# Altium PCB PCB_ACDC.PcbDoc
Units mm, origin at the board's own origin, x right, y up, seen from the top; angles counter-clockwise.
Board outline 302.1 x 78 mm, 2 copper layers (Top Layer, Bottom Layer); 162 components, 108 nets, 539 pads, 1 vias.
Unrouted connection lines stored in the file: 411.
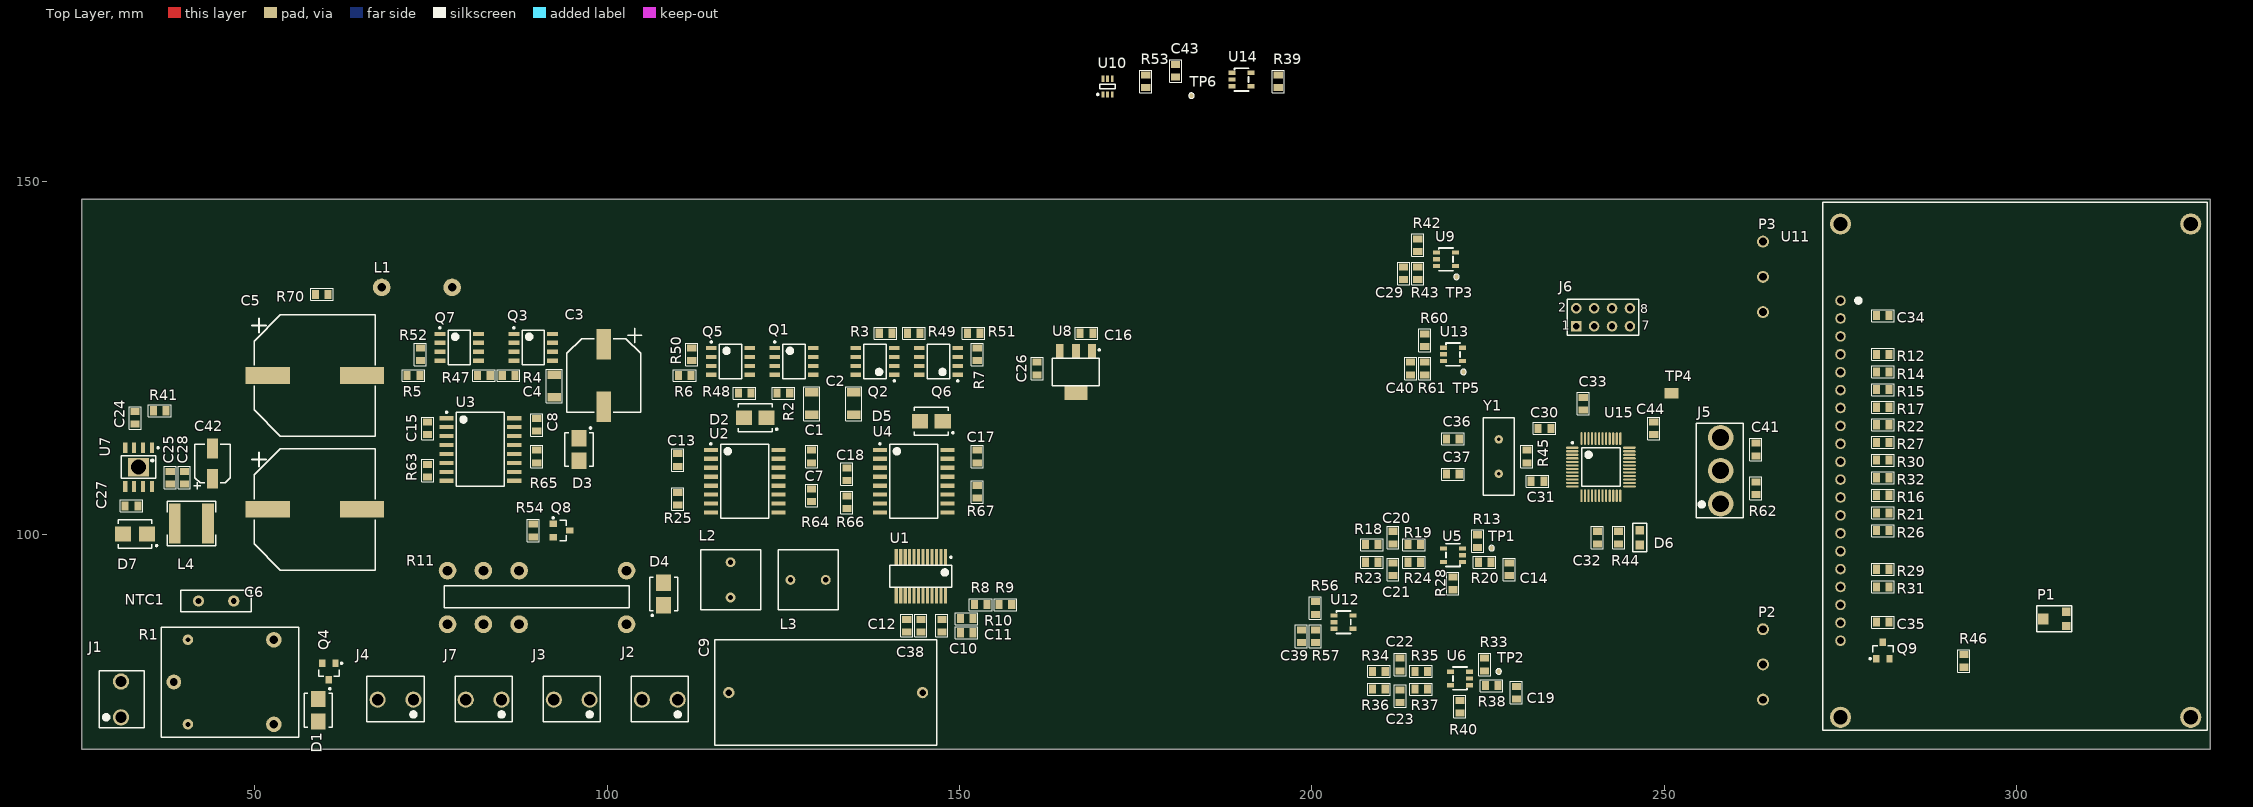
[diagram p0: Top Layer view]
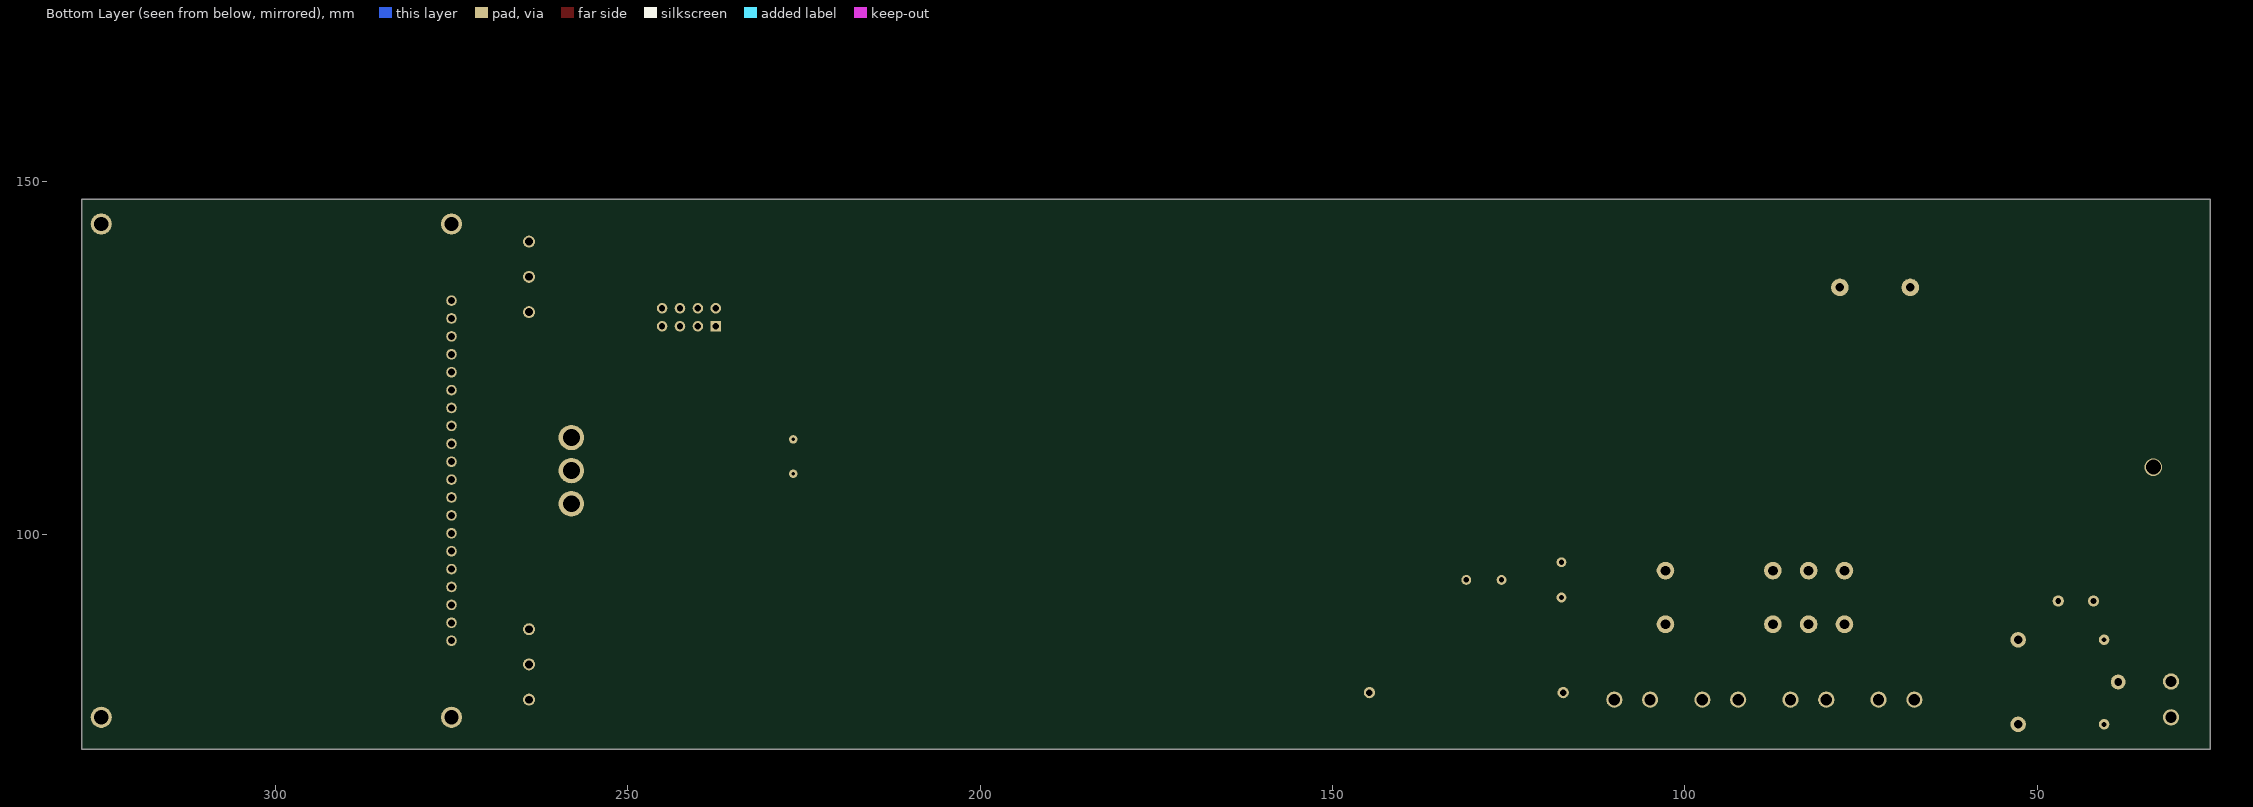
[diagram p1: Bottom Layer view, seen from below]

## Layer stack, top to bottom
Top Solder: solder mask 0.0102, Solder Resist, Dk 3.5
Top Layer: signal copper 0.0356
Dielectric 1: dielectric 0.32, FR-4, Dk 4.8
Bottom Layer: signal copper 0.0356
Bottom Solder: solder mask 0.0102, Solder Resist, Dk 3.5

## Board outline
25.4,69.5 327.5,69.5 327.5,147.5 25.4,147.5

## Design rules (kind name [scope] priority, off if disabled: settings)
Clearance [All] p1: gap=0.254
PolygonConnect [All] p1: connectstyle=Relief reliefconductorwidth=0.254 reliefentries=4 polygonreliefangle="90 Angle" airgapwidth=0.254
RoutingVias [All] p1: holewidth=0.711 width=1.27 viastyle="Through Hole" minholewidth=0.711 minwidth=1.27 maxholewidth=0.711 maxwidth=1.27
SolderMaskExpansion [All] p1: expansion=0.102
Width [All] p1: maxlimit=0.254 minlimit=0.254 preferedwidth=0.254
30 further rules are at their usual default settings.

## Classes and differential pairs
component class microcontroller: C30 C31 C32 C33 C34 C35 C36 C37 C41 C44 D6 J5 J6 P1 P2 P3 Q9 R12 R14 R15 R16 R17 R21 R22 R26 R27 R29 R30 R31 R32 R44 R45 R46 R62 TP4 U11 U15 Y1
component class Measurement: C14 C16 C19 C20 C21 C22 C23 C24 C25 C26 C27 C28 C29 C39 C40 C42 C43 D7 L4 R13 R18 R19 R20 R23 R24 R28 R33 R34 R35 R36 R37 R38 R39 R40 R41 R42 R43 R53 R56 R57 R60 R61 TP1 TP2 TP3 TP5 TP6 U5 U6 U7 U8 U9 U10 U12 U13 U14
component class "Inverters, drives": C1 C2 C3 C4 C5 C6 C7 C8 C9 C10 C11 C12 C13 C15 C17 C18 C38 D1 D2 D3 D4 D5 J1 J2 J3 J4 J7 L1 L2 L3 NTC1 Q1 Q2 Q3 Q4 Q5 Q6 Q7 Q8 R1 R2 R3 R4 R5 R6 R7 R8 R9 R10 R11 R25 R47 R48 R49 R50 R51 R52 R54 R63 R64 R65 R66 R67 R70 U1 U2 U3 U4

## Components (designator, comment, footprint, x,y, rotation, side; value= is the part's Value field where it differs from the comment)
C1 "1uF" CAPC3216X07N 129,118.5 r270 top
C2 "1uF" CAPC3216X07N 135,118.5 r270 top
C3 "330uF" CAPAE116103X105N 99.5,122.5 r270 top
C4 "1uF" CAPC3216X07N 92.5,121 r270 top
C5 "4700uF" CAPAE189170X165N 58.5,122.5 r0 top
C6 "4700uF" CAPAE189170X165N 58.5,103.5 r0 top
C7 "220nF" CAPC2012X06N 129,111 r270 top
C8 "220nF" CAPC2012X06N 90,115.5 r270 top
C9 "22uF" MKS4D052206F00KYSD 131,77.5 r0 top
C10 "20nF" CAPC2012X06N 147.5,87 r270 top
C11 "100nF" CAPC2012X06N 151,86 r180 top
C12 "1nF" CAPC2012X06N 142.5,87 r270 top
C13 "10nF" CAPC2012X06N 110,110.5 r90 top
C14 "100nF" CAPC2012X06N 228,95 r270 top
C15 "10nF" CAPC2012X06N 74.5,115 r90 top
C16 "10uF" CAPC2012X06N 168,128.5 r180 top
C17 "220nF" CAPC2012X06N 152.5,111 r270 top
C18 "10nF" CAPC2012X06N 134,108.5 r270 top
C19 "100nF" CAPC2012X06N 229,77.5 r270 top
C20 "20nF" CAPC2012X06N 211.5,99.5 r90 top
C21 "20nF" CAPC2012X06N 211.5,95 r270 top
C22 "2n2F" CAPC2012X06N 212.5,81.5 r90 top
C23 "2n2F" CAPC2012X06N 212.5,77 r270 top
C24 "22nF" CAPC2012X06N 33,116.5 r90 top
C25 "100nF" CAPC2012X06N 38,108 r90 top
C26 "100nF" CAPC2012X06N 161,123.5 r90 top
C27 "220nF" CAPC2012X06N 32.5,104 r0 top
C28 "220nF" CAPC2012X06N 40,108 r270 top
C29 "10nF" CAPC2012X06N 213,137 r270 top
C30 "100nF" CAPC2012X06N 233,115 r180 top
C31 "100nF" CAPC2012X06N 232,107.5 r180 top
C32 "100nF" CAPC2012X06N 240.5,99.5 r270 top
C33 "100nF" CAPC2012X06N 238.5,118.5 r90 top
C34 "100nF" CAPC2012X06N 281,131 r180 top
C35 "100nF" CAPC2012X06N 281,87.5 r0 top
C36 "15pF" CAPC2012X06N 220,113.5 r0 top
C37 "15pF" CAPC2012X06N 220,108.5 r0 top
C38 "1nF" CAPC2012X06N 144.5,87 r270 top
C39 "100nF" CAPC2012X06N 198.5,85.5 r270 top
C40 "10nF" CAPC2012X06N 214,123.5 r270 top
C41 "1uF" CAPC2012X06N 263,112 r90 top
C42 "100uF" CAPAE6253X61N_Buck 44,110 r90 top
C43 "100nF" CAPC2012X06N 180.658,165.738 r90 top
C44 "100nF" CAPC2012X06N 248.5,115 r270 top
D1 "S1A THRU S1M" DIOM4436X25N 59,75 r270 top
D2 "S1A THRU S1M" DIOM4436X25N 121,116.5 r180 top
D3 "S1A THRU S1M" DIOM4436X25N 96,112 r270 top
D4 "S1A THRU S1M" DIOM4436X25N 108,91.5 r90 top
D5 "S1A THRU S1M" DIOM4436X25N 146,116 r180 top
D6 "KPT-2012SECK" LED2012X11N_GREEN 246.5,99.5 r90 top
D7 "Comment" Schottky 33,100 r180 top
J1 "Sorkapocs" sorkapocs 31,74 r90 top
J2 "Sorkapocs" sorkapocs 110,76.5 r180 top
J3 "Sorkapocs" sorkapocs 97.5,76.5 r180 top
J4 "Sorkapocs" sorkapocs 72.5,76.5 r180 top
J5 "mts-102-a2" TOGGLE 258,109 r90 top
J6 "tüskesor" PINH_M_2X4_100MIL_TH_HARWIN 237.5,129.5 r0 top
J7 "Sorkapocs" sorkapocs 85,76.5 r180 top
L1 "80uH" IND_160uH 73,135 r0 top
L2 "100uH" RB0914101KLA 117.5,93.5 r270 top
L3 "100uH" RB0914101KLA 128.5,93.5 r0 top
L4 "47uH" INDP6060X45N 41,101.5 r0 top
NTC1 "10" NTC 44.5,90.5 r0 top
P1 "RKT-3305" TRIMMER 305.212,87.957 r90 top
P2 "XP-148M-A1M0" potmeter 264,81.5 r270 top
P3 "XP-148M-A1M0" potmeter 264,136.5 r90 top
Q1 "SI4174DY-T1-GE3" SOIC8-InvFet 126.5,124.5 r0 top
Q2 "SI4174DY-T1-GE3" SOIC8-InvFet 138,124.5 r180 top
Q3 "SI4174DY-T1-GE3" SOIC8-InvFet 89.5,126.5 r0 top
Q4 "2N7002" SOT95P240X111_SGD-3N 60.5,80.5 r270 top
Q5 "SI4174DY-T1-GE3" SOIC8-InvFet 117.5,124.5 r0 top
Q6 "SI4174DY-T1-GE3" SOIC8-InvFet 147,124.5 r180 top
Q7 "SI4174DY-T1-GE3" SOIC8-InvFet 79,126.5 r0 top
Q8 "2N7002" SOT95P240X111_SGD-3N 93.5,100.5 r0 top
Q9 "2N7002" SOT95P240X111_SGD-3N 281,83.5 r90 top
R1 "LEG-5F 5DC" relay_1 38.5,79 r0 top
R2 "20" RESC2012X06N 125,120 r180 top
R3 "20" RESC2012X06N 139.5,128.5 r0 top
R4 "50" RESC2012X06N 86,122.5 r180 top
R5 "50" RESC2012X06N 72.5,122.5 r0 top
R6 "20" RESC2012X06N 111,122.5 r0 top
R7 "20" RESC2012X06N 152.5,125.5 r90 top
R8 "3k" RESC2012X06N 153,90 r0 top
R9 "7k" RESC2012X06N 156.5,90 r0 top
R10 "330k" RESC2012X06N 151,88 r0 top
R11 "HRM1-S DC5V" relay 87.5,91 r180 top
R12 "100k" RESC2012X06N 281,125.5 r180 top
R13 "10k" RESC2012X06N 223.5,99 r90 top
R14 "100k" RESC2012X06N 281,123 r180 top
R15 "100k" RESC2012X06N 281,120.5 r180 top
R16 "100k" RESC2012X06N 281,105.5 r180 top
R17 "100k" RESC2012X06N 281,118 r180 top
R18 "60k" RESC2012X06N 208.5,98.5 r180 top
R19 "60k" RESC2012X06N 214.5,98.5 r180 top
R20 "170" RESC2012X06N 224.5,96 r180 top
R21 "100k" RESC2012X06N 281,103 r180 top
R22 "100k" RESC2012X06N 281,115.5 r180 top
R23 "60k" RESC2012X06N 208.5,96 r180 top
R24 "60k" RESC2012X06N 214.5,96 r180 top
R25 "3k3" RESC2012X06N 110,105 r90 top
R26 "100k" RESC2012X06N 281,100.5 r180 top
R27 "100k" RESC2012X06N 281,113 r180 top
R28 "10k" RESC2012X06N 220,93 r270 top
R29 "100k" RESC2012X06N 281,95 r180 top
R30 "100k" RESC2012X06N 281,110.5 r180 top
R31 "100k" RESC2012X06N 281,92.5 r180 top
R32 "100k" RESC2012X06N 281,108 r180 top
R33 "5k" RESC2012X06N 224.5,81.5 r90 top
R34 "600k" RESC2012X06N 209.5,80.5 r180 top
R35 "600k" RESC2012X06N 215.5,80.5 r180 top
R36 "600k" RESC2012X06N 209.5,78 r180 top
R37 "600k" RESC2012X06N 215.5,78 r180 top
R38 "170" RESC2012X06N 225.5,78.5 r180 top
R39 "16k" RESC2012X06N 195.209,164.238 r90 top
R40 "5k" RESC2012X06N 221,75.5 r270 top
R41 "22k" RESC2012X06N 36.5,117.5 r180 top
R42 "70k" RESC2012X06N 215,141 r270 top
R43 "10k" RESC2012X06N 215,137 r270 top
R44 "150" RESC2012X06N 243.5,99.5 r90 top
R45 "1M" RESC2012X06N 230.5,111 r90 top
R46 "1M" RESC2012X06N 292.5,82 r90 top
R47 "3k30" RESC2012X06N 82.5,122.5 r180 top
R48 "3k30" RESC2012X06N 119.5,120 r0 top
R49 "3k30" RESC2012X06N 143.5,128.5 r180 top
R50 "3k30" RESC2012X06N 112,125.5 r270 top
R51 "3k30" RESC2012X06N 152,128.5 r0 top
R52 "3k30" RESC2012X06N 73.5,125.5 r270 top
R53 "20k" RESC2012X06N 176.413,164.238 r90 top
R54 "3k3" RESC2012X06N 89.5,100.5 r90 top
R56 "10k" RESC2012X06N 200.5,89.5 r270 top
R57 "10k" RESC2012X06N 200.5,85.5 r270 top
R60 "80k" RESC2012X06N 216,127.5 r270 top
R61 "10k" RESC2012X06N 216,123.5 r270 top
R62 "10k" RESC2012X06N 263,106.5 r270 top
R63 "3k3" RESC2012X06N 74.5,109 r90 top
R64 "100" RESC2012X06N 129,105.5 r90 top
R65 "100" RESC2012X06N 90,111 r90 top
R66 "3k3" RESC2012X06N 134,104.5 r90 top
R67 "100" RESC2012X06N 152.5,106 r90 top
R70 "0.01" RESC2012X06N 59.5,134 r0 top
TP1 "Comment" TP080 225.5,98 r90 top
TP2 "Comment" TP080 226.5,80.5 r90 top
TP3 "Comment" TP080 220.5,136.5 r90 top
TP4 "Comment" TP200X150 251,120 r90 top
TP5 "Comment" TP080 221.5,123 r90 top
TP6 "Comment" TP080 182.89,162.206 r90 top
U1 "ACS709LLFTR-20BB-T" SOP64P600X175-24N 144.5,94 r270 top
U2 "LT1158CSW#PBF" SOIC127P1060X265-16N 119.5,107.5 r0 top
U3 "LT1158CSW#PBF" SOIC127P1060X265-16N 82,112 r0 top
U4 "LT1158CSW#PBF" SOIC127P1060X265-16N 143.5,107.5 r0 top
U5 "MCP6231T-E/OT" SOT23-5 220,97 r90 top
U6 "MCP6231T-E/OT" SOT23-5 221,79.5 r90 top
U7 "IFX91041EJV50XUMA1" BUCK_CONVERTER 33.5,109.5 r270 top
U8 "LD1117S33CTR" SOT230P700X180-4N 166.5,123 r270 top
U9 "MCP6231T-E/OT" SOT23-5 219,139 r270 top
U10 "INA213" SOT65P210X110-6N 171,163.5 r90 top
U11 "64128QCCBW-3LP" LCD 275,109 r270 top
U12 "MCP6231T-E/OT" SOT23-5 204.5,87.5 r270 top
U13 "MCP6231T-E/OT" SOT23-5 220,125.5 r270 top
U14 "MCP6231T-E/OT" SOT23-5 190,164.5 r270 top
U15 "STM32F303CBT7" STM-LQFP48_N 241,109.5 r0 top
Y1 "32Mhz" XTAL 226.5,111 r90 top

## Footprints (in the part's own frame and the unit in brackets; to place one, negate y for a bottom-side part, rotate by r counter-clockwise, add the part's x,y. Pads: shape width x height; smd on the part's side, far side on the other; paste and mask are expansions set on the pad)
BUCK_CONVERTER [mm] "SOIC, 8-Leads, Body 4.9x3.9mm, Pitch 1.27mm"
  rect 1.52x0.6 smd: 1(-2.74,1.905) 2(-2.74,0.635) 3(-2.74,-0.635) 4(-2.74,-1.905) 5(2.74,-1.905) 6(2.74,-0.635) 7(2.74,0.635) 8(2.74,1.905)
  rect 2.65x3 smd: GND(0,0)
  silkscreen extent -2.86,-2.45 1.58,2.88, body extent -1.95,-2.45 1.95,2.45, height 1.75
CAPAE6253X61N_Buck [mm] "Aluminum Electrolytic Capacitor, Body 5,30x5,30x6,10mm, IPC Medium Density"
  rect 2.8x1.6 smd: 1(-2.15,0) 2(2.15,0)
  silkscreen extent -3.65,-2.5 2.75,2.65, body extent -3.13,-2.75 3.13,2.75, height 6.1
CAPAE116103X105N [mm] "Aluminum Electrolytic Capacitor, Body 10,30x10,30x10,50mm, IPC Medium Density"
  rect 4.3x2.05 smd: 1(-4.425,0) 2(4.425,0)
  silkscreen extent -6.7,-5.25 5.25,5.4, body extent -5.25,-5.25 5.25,5.25, height 10.5
CAPAE189170X165N [mm] "Aluminum Electrolytic Capacitor, Body 17,00x17,00x16,50mm, IPC Medium Density"
  rect 6.3x2.35 smd: 1(-6.7,0) 2(6.7,0)
  silkscreen extent -8.9,-8.6 8.6,8.6, body extent -8.6,-8.6 8.6,8.6, height 16.5
CAPC2012X06N [mm] "Chip Capacitor, 2-Leads, Body 2,00x1,25mm, IPC Low Density"
  rect 1x1.3 smd: 1(-0.9,0) 2(0.9,0)
  silkscreen extent -1.6,-0.85 1.6,0.85, body extent -1,-0.62 1,0.63, height 0.78
CAPC3216X07N [mm] "Chip Capacitor, 2-Leads, Body 3,10x1,60mm, IPC Low Density"
  rect 1.2x1.9 smd: 1(-1.6,0) 2(1.6,0)
  silkscreen extent -2.4,-1.15 2.4,1.15, body extent -1.56,-0.8 1.64,0.8, height 1
DIOM4436X25N [mm] "Molded Diode, 2-Leads, Body 4,38x3,62mm, IPC Medium Density"
  rect 2.3x2.1 smd: A(1.6,0) C(-1.6,0)
  silkscreen extent -3.17,-2 2.4,2, body extent -2.65,-1.85 2.65,1.85, height 2.24
IND_160uH [mm]
  round 2.5 hole 1.2: 1(-5,0) 2(5,0)
INDP6060X45N [mm] "Precision Wire Wound Inductor, 2-Leads, Body 6,00x6,00mm, IPC Medium Density"
  rect 1.65x5.7 smd: 1(-2.35,0) 2(2.35,0)
  silkscreen extent -3.45,-3.15 3.45,3.15, body extent -3,-3 3,3, height 4.5
LCD [mm]
  round 1.5 hole 1: 1(-24.13,0) 2(-21.59,0) 3(-19.05,0) 4(-16.51,0) 5(-13.97,0) 6(-11.43,0) 7(-8.89,0) 8(-6.35,0) 9(-3.81,0) 10(-1.27,0) 11(1.27,0) 12(3.81,0) 13(6.35,0) 14(8.89,0) 15(11.43,0) 16(13.97,0) 17(16.51,0) 18(19.05,0) 19(21.59,0) 20(24.13,0)
  round 3 hole 2: ""(-35,49.7) ""(-35,0) ""(35,49.7) ""(35,0)
  silkscreen extent -38.1,-2.54 36.83,52.07, body extent -37.5,-2.5 37.5,50.2, height 8.51
LED2012X11N_GREEN [mm] "Chip LED, 2-Leads, Body 2.00x1.25mm, IPC Low Density"
  rect 1.25x1.25 smd: A(-1.05,0) C(1.05,0)
  silkscreen extent -2,-1 2,1, body extent -1.01,-0.62 1.01,0.63, height 1.1
MKS4D052206F00KYSD [mm]
  round 1.6 hole 0.9: 1(-13.75,0) 2(13.75,0)
  silkscreen extent -15.75,-7.5 15.75,7.5, body extent -15.75,-7.5 15.75,7.5, height 26
NTC [mm]
  round 1.6 hole 0.8: 1(-2.5,0) 2(2.5,0)
  silkscreen extent -5,-1.5 5,1.5, body extent -7.5,-3 7.5,3, height 21.5
PINH_M_2X4_100MIL_TH_HARWIN [mm]
  rect 1.5x1.5 hole 0.9: 1(0,0)
  round 1.5 hole 0.9: 2(0,2.54) 3(2.54,0) 4(2.54,2.54) 5(5.08,0) 6(5.08,2.54) 7(7.62,0) 8(7.62,2.54)
  silkscreen extent -1.27,-1.29 8.89,3.81, body extent -1.27,-1.27 8.89,3.81, height 8.65
potmeter [mm]
  round 1.7 hole 1.1: 1(-5,0) 2(0,0) 3(5,0)
RB0914101KLA [mm]
  round 1.4 hole 0.75: 1(-2.5,0) 2(2.5,0)
  silkscreen extent -4.25,-4.25 4.25,4.25, body extent -4.4,-4.4 4.4,4.4, height 12
relay [mm]
  round 2.5 hole 1.4: 1(-15.24,3.8) 2(-15.24,-3.8) 3(5.08,3.8) 4(10.16,3.8) 5(5.08,-3.8) 6(10.16,-3.8) ""(0,3.8) ""(0,-3.8)
  silkscreen extent -15.6,-1.65 10.6,1.45, body extent -17.1,-6.3 11.9,6.3, height 20.8
relay_1 [mm]
  round 1.5 hole 0.7: 1(2,6) 2(2,-6)
  round 2.1 hole 1.1: 3(0,0)
  round 2.2 hole 1.2: 4(14.2,6) ""(14.2,-6)
  silkscreen extent -1.8,-7.8 17.7,7.8, body extent -2,-7.9 17.5,7.9, height 15
RESC2012X06N [mm] "Chip Resistor, 2-Leads, Body 2,00x1,25mm, IPC Low Density"
  rect 1x1.3 smd: 1(-0.9,0) 2(0.9,0)
  silkscreen extent -1.6,-0.85 1.6,0.85, body extent -1,-0.62 1,0.63, height 0.45
Schottky [mm] "Molded Diode, 2-Leads, Body 4,38x3,62mm, IPC Medium Density"
  rect 2.3x2.1 smd: A(1.7,0) C(-1.7,0)
  silkscreen extent -3.18,-2 2.4,2, body extent -2.65,-1.85 2.65,1.85, height 2.24
SOIC8-InvFet [mm] "SOIC, 8-Leads, Body 4.9x3.9mm, Pitch 1.27mm"
  rect 1.52x0.6 smd: D(2.74,-1.905) D(2.74,-0.635) D(2.74,0.635) D(2.74,1.905) G(-2.74,-1.905) S(-2.74,-0.635) S(-2.74,0.635) S(-2.74,1.905)
  silkscreen extent -2.86,-2.45 1.58,2.88, body extent -1.95,-2.45 1.95,2.45, height 1.75
SOIC127P1060X265-16N [mm] "SOIC, 16-Leads, Body 10,30x7,50mm, Pitch 1,27mm, IPC Medium Density"
  rect 2x0.6 smd: 1(-4.8,4.445) 2(-4.8,3.175) 3(-4.8,1.905) 4(-4.8,0.635) 5(-4.8,-0.635) 6(-4.8,-1.905) 7(-4.8,-3.175) 8(-4.8,-4.445) 9(4.8,-4.445) 10(4.8,-3.175) 11(4.8,-1.905) 12(4.8,-0.635) 13(4.8,0.635) 14(4.8,1.905) 15(4.8,3.175) 16(4.8,4.445)
  silkscreen extent -4.92,-5.25 3.4,5.42, body extent -5.32,-5.25 5.32,5.25, height 2.65
SOP64P600X175-24N [mm] "SOP, 24-Leads, Body 8,66x3,91mm, Pitch 0,64mm, IPC Medium Density"
  rect 2.3x0.45 smd: 1(-2.7,3.492) 2(-2.7,2.857) 3(-2.7,2.222) 4(-2.7,1.587) 5(-2.7,0.952) 6(-2.7,0.317) 7(-2.7,-0.318) 8(-2.7,-0.953) 9(-2.7,-1.588) 10(-2.7,-2.223) 11(-2.7,-2.858) 12(-2.7,-3.493) 13(2.7,-3.492) 14(2.7,-2.857) 15(2.7,-2.222) 16(2.7,-1.587) 17(2.7,-0.952) 18(2.7,-0.317) 19(2.7,0.318) 20(2.7,0.953) 21(2.7,1.588) 22(2.7,2.223) 23(2.7,2.858) 24(2.7,3.493)
  silkscreen extent -2.82,-4.4 1.55,4.4, body extent -3,-4.4 3,4.4, height 1.75
sorkapocs [mm]
  round 2.3 hole 1.6: 1(0,0) 2(5.08,0)
  silkscreen extent -1.5,-3.3 6.6,3.1, body extent -2.54,-4.75 8.19,4.75, height 15.01
SOT23-5 [mm]
  rect 0.6x1 smd: 1(-0.95,-1.35) 2(0,-1.35) 3(0.95,-1.35) 4(0.95,1.35) 5(-0.95,1.35)
  silkscreen extent -1.6,-1 1.63,1, body extent -1.45,-1.41 1.45,1.41, height 1.45
SOT65P210X110-6N [mm] "SOT23, 6-Leads, Body 2,00x2,10mm, Pitch 0,65mm, IPC Medium Density"
  rect 0.9x0.4 smd: 1(-1.125,0.65) 2(-1.125,0) 3(-1.125,-0.65) 4(1.125,-0.65) 5(1.125,0) 6(1.125,0.65)
  silkscreen extent -1.25,-1.1 0.3,1.52, body extent -1.3,-1.1 1.3,1.1, height 1.1
SOT95P240X111_SGD-3N [mm] "SOT23, 3-Leads, Body 2,90x2,37mm, Pitch 0,95mm, IPC Medium Density"
  rect 1.05x0.9 smd: D(1.175,0) G(-1.175,0.95) S(-1.175,-0.95)
  silkscreen extent -1.3,-1.45 0.65,1.93, body extent -1.21,-1.45 1.21,1.45, height 0.98
SOT230P700X180-4N [mm] "SOT223, 4-Leads, Body 6,50x7,00mm (avg), Pitch 2,30mm, IPC Medium Density"
  rect 2.15x1.1 smd: 1(-2.9,2.3) 2(-2.9,0) 3(-2.9,-2.3)
  rect 2.15x3.25 smd: 4(2.9,0)
  silkscreen extent -3.25,-3.35 1.95,3.43, body extent -3.5,-3.35 3.5,3.35, height 1.8
STM-LQFP48_N [mm] "QFP, 48-Leads, Body 7x7mm, Pitch 0.5mm, IPC Medium Density"
  oval 1.8x0.3 smd: 1(-4.05,2.75) 2(-4.05,2.25) 3(-4.05,1.75) 4(-4.05,1.25) 5(-4.05,0.75) 6(-4.05,0.25) 7(-4.05,-0.25) 8(-4.05,-0.75) 9(-4.05,-1.25) 10(-4.05,-1.75) 11(-4.05,-2.25) 12(-4.05,-2.75) 25(4.05,-2.75) 26(4.05,-2.25) 27(4.05,-1.75) 28(4.05,-1.25) 29(4.05,-0.75) 30(4.05,-0.25) 31(4.05,0.25) 32(4.05,0.75) 33(4.05,1.25) 34(4.05,1.75) 35(4.05,2.25) 36(4.05,2.75)
  oval 0.3x1.8 smd: 13(-2.75,-4.05) 14(-2.25,-4.05) 15(-1.75,-4.05) 16(-1.25,-4.05) 17(-0.75,-4.05) 18(-0.25,-4.05) 19(0.25,-4.05) 20(0.75,-4.05) 21(1.25,-4.05) 22(1.75,-4.05) 23(2.25,-4.05) 24(2.75,-4.05) 37(2.75,4.05) 38(2.25,4.05) 39(1.75,4.05) 40(1.25,4.05) 41(0.75,4.05) 42(0.25,4.05) 43(-0.25,4.05) 44(-0.75,4.05) 45(-1.25,4.05) 46(-1.75,4.05) 47(-2.25,4.05) 48(-2.75,4.05)
  silkscreen extent -4.17,-2.75 2.75,3.57, body extent -3.5,-3.5 3.5,3.5, height 1.6
TOGGLE [mm]
  round 3.6 hole 2.4: 1(-4.7,0) 2(0,0) 3(4.7,0)
  silkscreen extent -6.7,-3.2 6.7,3.5, body extent -6.35,-3.2 6.35,3.4, height 28.08
TP080 [mm] "Test point 0.8mm"
  round 0.8 smd paste-0.5: 1(0,0)
  silkscreen extent -0.4,-0.4 0.4,0.4
TP200X150 [mm] "SMD testpoint 2X1,5mm"
  rect 1.5x2 smd paste-1: 1(0,0)
TRIMMER [mm]
  rect 1.2x1.2 smd: 1(-1,-1.8) 3(1,-1.8)
  rect 1.6x1.5 smd: 2(0,1.45)
  silkscreen extent -1.83,-2.63 1.85,2.4, body extent -1.06,-1.63 1.04,1.07, height 0.8
XTAL [mm]
  round 1.2 hole 0.5: 1(-2.44,0) 2(2.44,0)
  silkscreen extent -5.49,-2.2 5.5,2.2, body extent -5.49,-2.25 5.49,2.25, height 3.6

## Part data
C1 C2 C4: library part Csnubber
C3 C5 C6 C42: library part CAPAE
C7 C8 C9 C10 C11 C12 C13 C14 C15 C16 C17 C18 C19 C20 C21 C22 C23 C24 C25 C26 C27 C28 C29 C30 C31 C32 C33 C34 C35 C36 C37 C38 C39 C40 C41 C43 C44: library part CAPC
D1 D2 D3 D4 D5: library part RELÉ_DIO
D6: library part LED_GREEN
D7: library part DIO_SCHTTKY
J1 J2 J3 J4 J7: "RM5.08 CLL5.08/2"
J6: library part CON_2X4
L1 L2 L3 L4: library part IND
NTC1: library part NTC
P1: library part TRIMMER
P2 P3: library part Potmeter
Q1 Q2 Q3 Q5 Q6 Q7: library part INVERTER_NFET
Q4 Q8 Q9: library part RELÉ_NFET
R1: library part RELÉ_1CSAT
R2 R3 R4 R5 R6 R7 R8 R9 R10 R12 R13 R14 R15 R16 R17 R18 R19 R20 R21 R22 R23 R24 R25 R26 R27 R28 R29 R30 R31 R32 R33 R34 R35 R36 R37 R38 R39 R40 R41 R42 R43 R44 R45 R46 R47 R48 R49 R50 R51 R52 R53 R54 R56 R57 R60 R61 R62 R63 R64 R65 R66 R67 R70: library part RES_US_HOR
R11: library part RELÉ
TP1 TP2 TP3 TP4 TP5 TP6: library part TP_SMD
U1: library part árammérõ
U2 U3 U4: library part meghajtó
U5 U6 U9 U12 U13 U14: library part követõerõsítõ
U7: library part 5V_BUCK
U8: library part LDO5V-3V3
U11: library part LCD
U15: "ARM Cortex-M4 32-bit MCU, 128 KB Flash, 32 KB Internal RAM, 37 I/Os, 48-pin LQFP, -40 to 105 degC, Tray"
Y1: library part XTAL

## Via types
v1: diameter 2.5, hole 2.1, Top Layer to Bottom Layer, 1 vias

## Nets (pads, with @x,y where several pads share a name; then routed paths per layer and width w, separated by ;. In a path a pad name is that pad's centre, name@x,y a point inside that pad or via, vN(x,y) a via of type N, cw(c..) or ccw(c..) an arc to the next point about the centre after c; other vN are vias at no path point)
1V65: R28.2 R40.2 U12.1 U12.4
3V3: C11.1 C16.2 C30.1 C31.1 C32.1 C33.1 C43.1 C44.1 J6.7 J6.8 P2.3 P3.3 R8.1 R10.2 R44.2 R56.1 R62.2 U1.20 U5.5 U6.5 U8.2 U9.5 U10.3 U12.5 U13.5 U14.5 U15.1 U15.9 U15.24 U15.36 U15.48
5V: C26.2 C28.2 C34.1 C35.1 C42.1 D1.C D2.A D3.A D4.C D5.A L4.2 R1.1 R11.1 R12.1 R14.1 R15.1 R16.1 R17.1 R21.1 R22.1 R26.1 R27.1 R29.1 R30.1 R31.1 R32.1 U2.2 U2.4 U2.10 U3.2 U3.4 U3.10 U4.2 U4.4 U4.10 U7.4 U8.3 U11.1 U11.19
/CS1: R16.2 U11.12 U15.21
/CS2: R21.2 U11.13 U15.22
/FLT1: U2.5 U15.2
/FLT2: U3.5 U15.3
/FLT3: U4.5 U15.4
B_SOURCE: C8.2 L1.2 Q3.S Q7.D R47.2 U3.13
BOOST_BOTTOM: R5.1 U3.8 U3.9
BOOST_CURR+: C5.1 C6.1 NTC1.2 R1.4 R70.1 U10.4
BOOST_CURR-: L1.1 R70.2 U10.5
BOOST_TOP: R4.1 U3.14 U3.15
D/I: R29.2 U11.16 U15.45
DB0: R12.2 U11.4 U15.18
DB1: R14.2 U11.5 U15.19
DB2: R15.2 U11.6 U15.20
DB3: R17.2 U11.7 U15.39
DB4: R22.2 U11.8 U15.40
DB5: R27.2 U11.9 U15.41
DB6: R30.2 U11.10 U15.42
DB7: R32.2 U11.11 U15.43
EN: R31.2 U11.17 U15.25
GND: C1.2 C2.2 C3.2 C4.2 C5.2 C6.2 C10.2 C11.2 C12.2 C13.2 C14.2 C15.2 C16.1 C18.2 C19.2 C20.2 C21.2 C22.2 C23.2 C25.2 C26.1 C28.1 C29.2 C30.2 C31.2 C32.2 C33.2 C34.2 C35.2 C36.1 C37.1 C38.2 C39.2 C40.2 C41.2 C42.2 C43.2 C44.2 D6.C D7.A J1.1 J5.3 J6.5 J6.6 P2.1 P3.1 Q4.S Q5.S Q6.S Q7.S Q8.S Q9.S R9.2 R25.1 R41.1 R43.2 R46.1 R50.1 R51.1 R52.1 R53.2 R54.1 R57.2 R61.2 R63.1 R66.1 U1.15 U2.7 U3.7 U4.7 U5.2 U6.2 U7.1 U7.2 U8.1 U8.4 U9.2 U10.1 U10.2 U11.2 U11.15 U12.2 U13.2 U14.2 U15.8 U15.23 U15.35 U15.44 U15.47
LEFT_BOTTOM: R6.1 U2.8 U2.9
LEFT_TOP: R2.1 U2.14 U2.15
NetC7_1: C7.1 D2.C U2.16
NetC8_1: C8.1 D3.C U3.16
NetC10_1: C10.1 R10.1 U1.19
NetC12_1: C12.1 U1.16
NetC13_1: C13.1 U2.3
NetC15_1: C15.1 U3.3
NetC17_1: C17.1 D5.C U4.16
NetC18_1: C18.1 U4.3
NetC20_1: C20.1 R18.1 R19.2
NetC21_1: C21.1 R23.1 R24.2
NetC22_1: C22.1 R34.1 R35.2
NetC23_1: C23.1 R36.1 R37.2
NetC24_1: C24.1 U7.3
NetC24_2: C24.2 R41.2
NetC27_1: C27.1 U7.5
NetC27_2: C27.2 D7.C L4.1 U7.6
NetC29_1: C29.1 R42.2 R43.1 U9.3
NetC36_2: C36.2 R45.2 U15.5 Y1.2
NetC37_2: C37.2 R45.1 U15.6 Y1.1
NetC39_1: C39.1 R56.2 R57.1 U12.3
NetC40_1: C40.1 R60.2 R61.1 U13.3
NetC41_1: C41.1 J5.2 R62.1 U15.30
NetD1_A: D1.A Q4.D R1.2
NetD4_A: D4.A Q8.D R11.2
NetD6_A: D6.A R44.1
NetJ3_1: J3.1 J7.1 R11.3
NetJ3_2: J3.2 J7.2 R11.5
NetL3_2: L3.2 U1.7 U1.8 U1.9 U1.10 U1.11 U1.12
NetP1_1: P1.1 R46.2
NetP1_2: P1.2 U11.3
NetP1_3: P1.3 U11.18
NetQ1_G: Q1.G R2.2 R48.2
NetQ2_G: Q2.G R3.2 R49.2
NetQ3_G: Q3.G R4.2 R47.1
NetQ5_G: Q5.G R6.2 R50.2
NetQ6_G: Q6.G R7.2 R51.2
NetQ7_G: Q7.G R5.2 R52.2
NetQ9_D: Q9.D U11.20
NetR8_2: R8.2 R9.1 U1.21
NetR13_1: R13.1 R20.2 U5.1
NetR13_2: R13.2 R19.1 U5.4
NetR24_1: R24.1 R28.1 U5.3
NetR33_1: R33.1 R38.2 U6.1
NetR33_2: R33.2 R35.1 U6.4
NetR37_1: R37.1 R40.1 U6.3
NetR39_1: R39.1 U10.6
NetR39_2: R39.2 R53.1 U14.3
NetR64_1: R64.1 U2.11
NetR64_2: R64.2 U2.12
NetR65_1: R65.1 U3.11
NetR65_2: R65.2 U3.12
NetR67_1: R67.1 U4.11
NetR67_2: R67.2 U4.12
NetTP4_1: TP4.1 U15.33
NRST: J6.1 U15.7
POT2FREQUENCY: P3.2 U15.14
POT2VOLTAGE: P2.2 U15.15
PRE: Q4.G U15.31
PWM_BOOST: R63.2 U3.6 U15.16
PWM_LED: Q9.G U15.46
PWM_LEFT: R25.2 U2.6 U15.17
PWM_RIGHT: R66.2 U4.6 U15.29
RELAY: Q8.G R54.2 U15.32
RIGHT_BOTTOM: R7.1 U4.8 U4.9
RIGHT_TOP: R3.1 U4.14 U4.15
RST: R26.2 U11.14 U15.26
SWCLK: J6.2 U15.37
SWDIO: J6.4 U15.34
T_SOURCE_LEFT: C7.2 L2.1 Q1.S Q5.D R48.1 U2.13
T_SOURCE_RIGHT: C17.2 Q2.S Q6.D R49.1 U1.1 U1.2 U1.3 U1.4 U1.5 U1.6 U4.13
U_PHASE+: J4.1 R11.6 R34.2
U_PHASE-: J4.2 R11.4 R36.2
U_PRIMER+: C9.1 J2.2 L2.2 R18.2
U_PRIMER-: C9.2 J2.1 L3.1 R23.2
UBOOSTER: C1.1 C2.1 C3.1 C4.1 Q1.D Q2.D Q3.D R60.1
UBOOSTER_ANALOG: TP5.1 U13.1 U13.4 U15.28
UIN: C25.1 J1.2 NTC1.1 R1.3 R42.1 U7.7 U7.8
UIN_ANALOG: TP3.1 U9.1 U9.4 U15.10
UPHASE_ANALOG: C19.1 R38.1 TP2.1 U15.12
UPRIMER_ANALOG: C14.1 R20.1 TP1.1 U15.11
VI_BOOST_OUT: TP6.1 U14.1 U14.4 U15.27
VIOUT: C38.1 U1.18 U15.13
pads on no net: J5.1 J6.3 R1. R11. U1.13 U1.14 U1.17 U1.22 U1.23 U1.24 U2.1 U3.1 U4.1 U7.GND U11. U15.38
copper on no net:
  other v1: 33.5,109.5

## Text inside footprints (layer, text, board x,y; h text height)
J6: Top Overlay "2" at 234.96,131.532 h1.27; Top Overlay "1" at 235.468,128.992 h1.27; Top Overlay "7" at 246.804,128.992 h1.27; Top Overlay "8" at 246.601,131.329 h1.27